# Altium PCB PCB_PWM_2022-05-03.pcbdoc
Units mm, origin at the board's own origin, x right, y up, seen from the top; angles counter-clockwise.
Board outline 126.75 x 66.17 mm, 2 copper layers (Top Layer, Bottom Layer); 12 components, 9 nets, 64 pads, 5 vias.
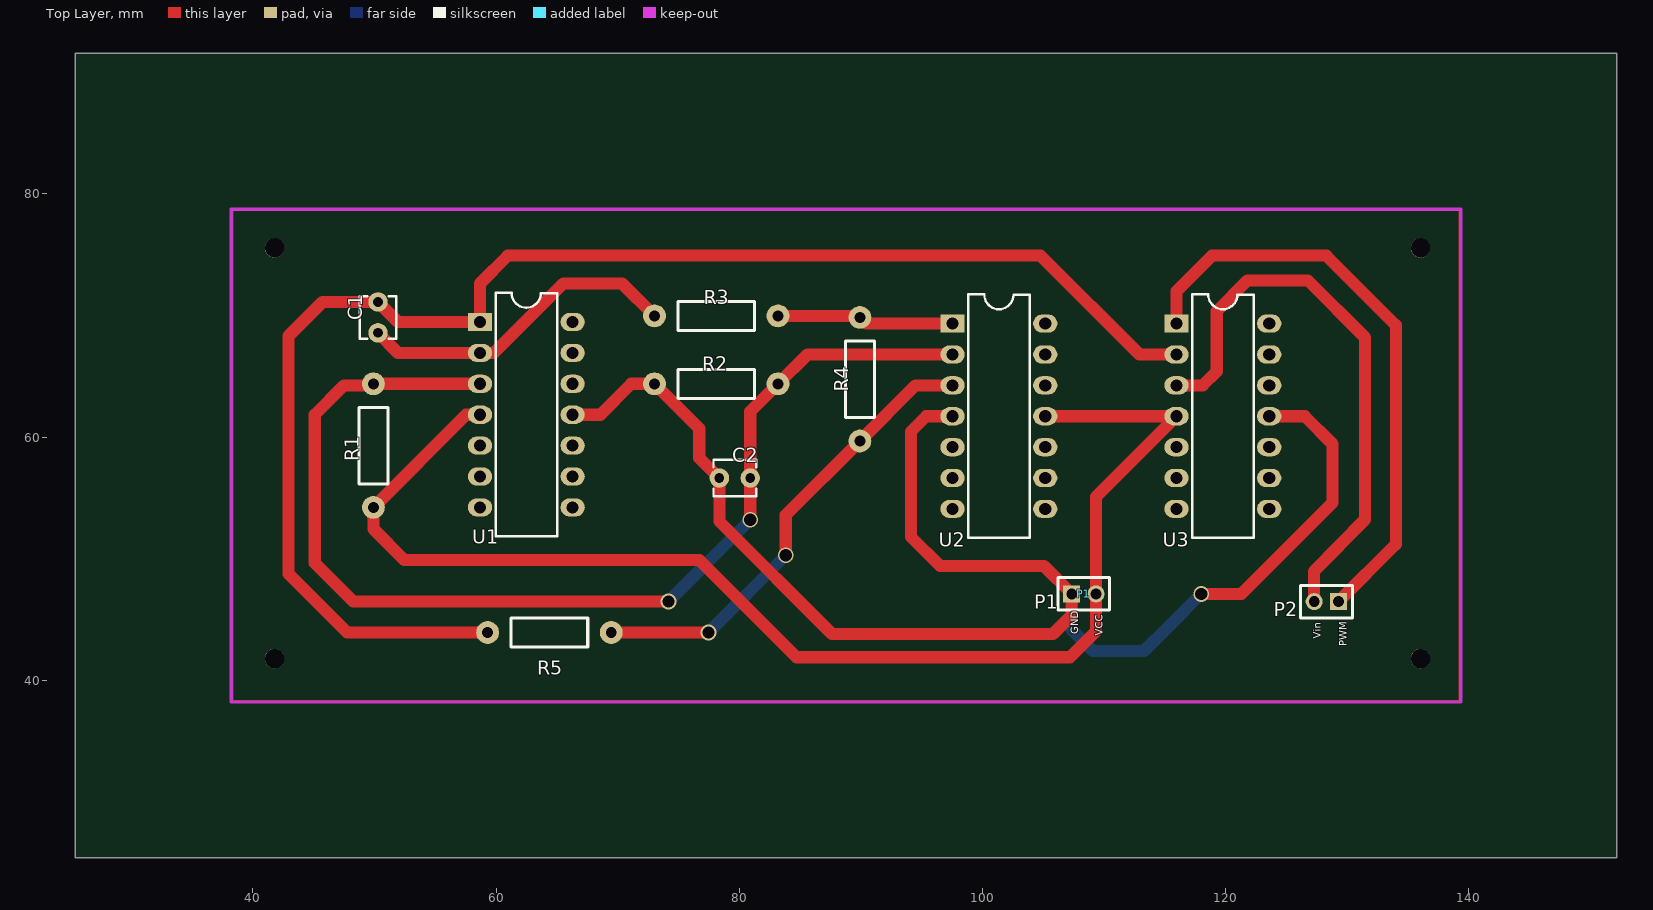
[diagram p0: Top Layer view]
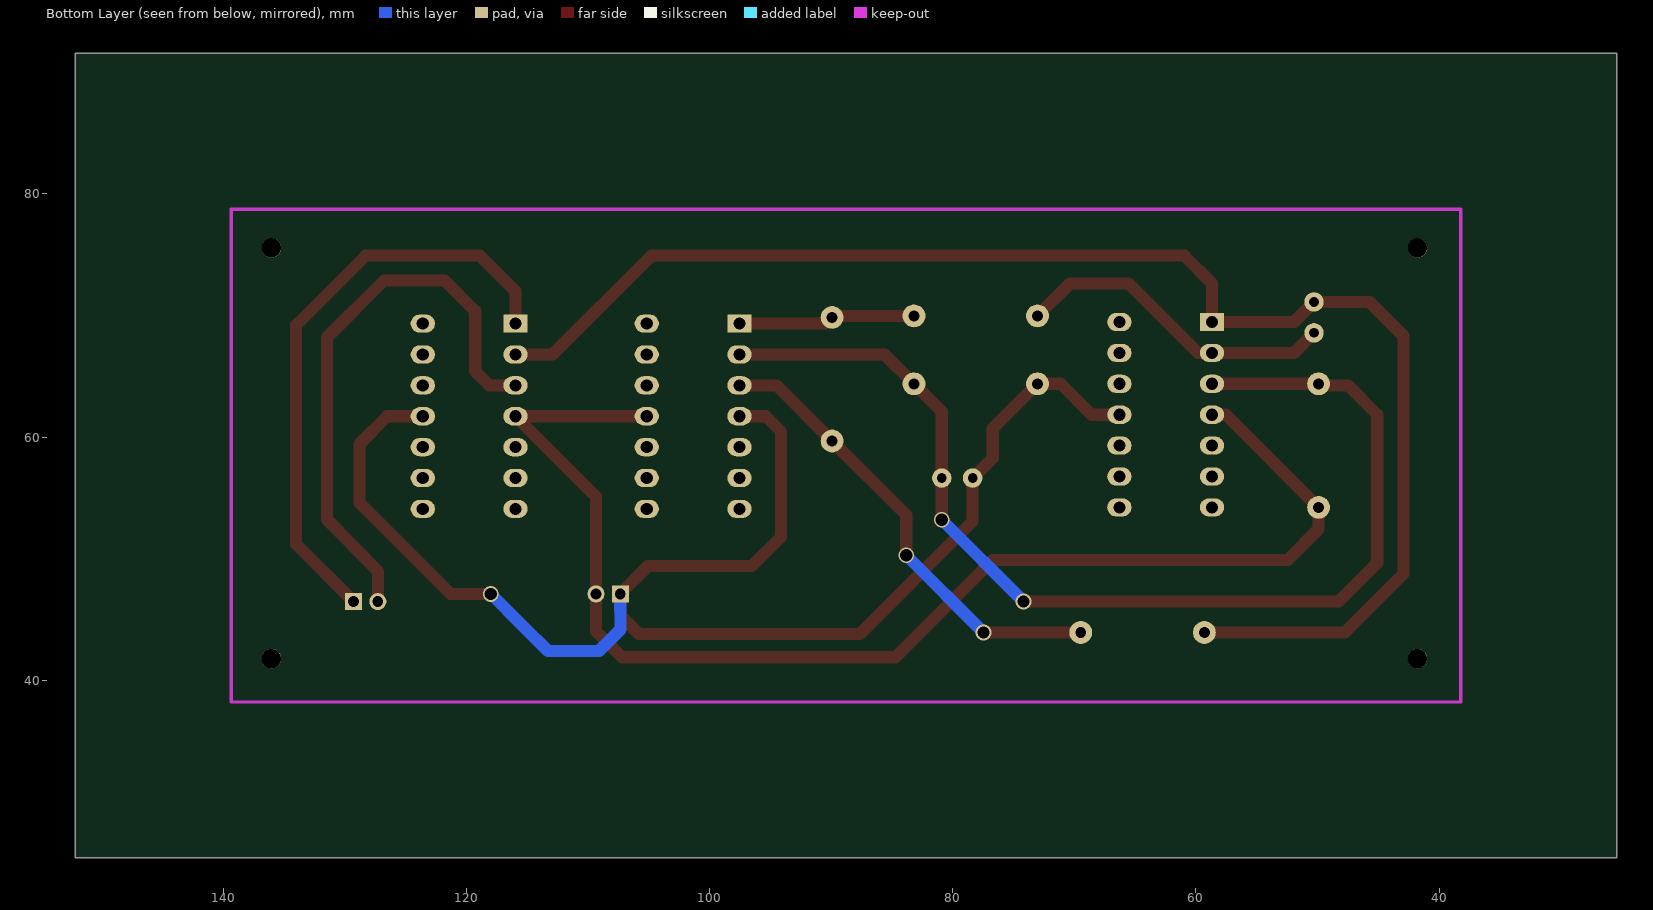
[diagram p1: Bottom Layer view, seen from below]

## Layer stack, top to bottom
Top Layer: signal copper (thickness not stored)
Dielectric: dielectric 0.32, FR-4, Dk 4.8
Bottom Layer: signal copper (thickness not stored)

## Board outline
152.146,25.4 25.4,25.4 25.4,91.567 152.146,91.567

## Components (designator, comment, footprint, x,y, rotation, side; value= is the part's Value field where it differs from the comment)
C1 "10nF" CAP-TH_L3.5-W3.0-P2.54-D0.8 50.292,69.85 r90 top
C2 "1uF" CAP-TH_L3.5-W3.0-P2.54-D0.8 79.629,56.642 r0 top
P1 "Female header1*2P" HDR-TH_2P-P2.00-V-F-1 108.331,47.117 r0 top
P2 "Female header1*2P" HDR-TH_2P-P2.00-V-F-1 128.27,46.482 r180 top
R1 "1k" AXIAL-0.4 49.911,59.309 r270 top
R2 "1k" AXIAL-0.4 78.105,64.389 r0 top
R3 "1k" AXIAL-0.4 78.105,69.977 r180 top
R4 "3k" AXIAL-0.4 89.916,64.77 r90 top
R5 "1k" AXIAL-0.4 64.389,43.942 r0 top
U1 "TL084CN" DIP-14_L20.0-W7.6-P2.54-LS7.6-BL 62.484,61.849 r270 top
U2 "TL084CN" DIP-14_L20.0-W7.6-P2.54-LS7.6-BL 101.346,61.722 r270 top
U3 "TL084CN" DIP-14_L20.0-W7.6-P2.54-LS7.6-BL 119.761,61.722 r270 top

## Footprints (in the part's own frame and the unit in brackets; to place one, negate y for a bottom-side part, rotate by r counter-clockwise, add the part's x,y. Pads: shape width x height; smd on the part's side, far side on the other; paste and mask are expansions set on the pad)
AXIAL-0.4 [mil]
  round 74 hole 35.4: 1(-200,0) 2(200,0)
  silkscreen extent -124,-47 124,47
CAP-TH_L3.5-W3.0-P2.54-D0.8 [mm]
  round 1.6 hole 0.8: 1(-1.27,0) 2(1.27,0)
  silkscreen extent -1.75,-1.5 1.75,1.5
DIP-14_L20.0-W7.6-P2.54-LS7.6-BL [mm]
  rect 1.5x2 hole 1: 1(-7.62,-3.81)
  oval 1.5x2 hole 1: 2(-5.08,-3.81) 3(-2.54,-3.81) 4(0,-3.81) 5(2.54,-3.81) 6(5.08,-3.81) 7(7.62,-3.81) 8(7.62,3.81) 9(5.08,3.81) 10(2.54,3.81) 11(0,3.81) 12(-2.54,3.81) 13(-5.08,3.81) 14(-7.62,3.81)
  silkscreen extent -10.03,-2.53 10,2.54
HDR-TH_2P-P2.00-V-F-1 [mm]
  rect 1.4x1.4 hole 0.889: 1(-1,0)
  round 1.4 hole 0.889: 2(1,0)
  silkscreen extent -2.14,-1.32 2.12,1.35

## Free pads (board coordinates)
  round 1.6 hole 1.6: 2(41.783,41.783) 2(41.783,75.565) 2(136.017,41.783) 2(136.017,75.565)

## Via types
v1: diameter 1.3, hole 1, Top Layer to Bottom Layer, tented both sides, 5 vias

## Nets (pads, with @x,y where several pads share a name; then routed paths per layer and width w, separated by ;. In a path a pad name is that pad's centre, name@x,y a point inside that pad or via, vN(x,y) a via of type N, cw(c..) or ccw(c..) an arc to the next point about the centre after c; other vN are vias at no path point)
GND: C2.1 P1.1 R2.1 U1.11 U2.4 U3.11 | length 125.4
  Top Layer w1: U1.11 68.58,61.849 71.12,64.389 R2.1 76.708,60.706 76.708,58.293 C2.1 78.359,53.086 87.63,43.815 105.791,43.815 107.315,45.339 P1.1 105.044,49.403 96.52,49.403 94.107,51.816 94.107,60.452 95.377,61.722 U2.4 ; v1(117.983,47.117) 121.285,47.117 128.778,54.61 128.778,59.436 126.492,61.722 U3.11
  Bottom Layer w1: P1.1 107.315,44.196 109.093,42.418 113.284,42.418 115.349,44.483 v1(117.983,47.117)
PWM: P2.1 U3.1 | length 49
  Top Layer w1: U3.1 115.951,72.009 118.872,74.93 128.27,74.93 133.985,69.215 133.985,51.196 P2.1
R1_1: C2.2 R1.1 R2.2 U1.3 U2.2 | length 94.2
  Top Layer w1: U1.3 R1.1 49.784,64.262 47.498,64.262 45.085,61.849 45.085,49.657 48.26,46.482 v1(74.168,46.482) ; v1(80.899,53.213) C2.2 80.899,62.103 R2.2 85.598,66.802 U2.2
  Bottom Layer w1: v1(74.168,46.482) v1(80.899,53.213)
R3_1: R3.1 R4.2 U2.1 | length 14.6
  Top Layer w1: R3.1 89.789,69.977 R4.2 90.424,69.342 U2.1
R3_2: C1.1 R3.2 U1.2 | length 26.9
  Top Layer w1: C1.1 51.943,66.929 U1.2 59.817,66.929 65.532,72.644 70.358,72.644 R3.2
R5_1: C1.2 R5.1 U1.1 U3.2 | length 120.3
  Top Layer w1: R5.1 47.752,43.942 42.926,48.768 42.926,68.326 45.72,71.12 C1.2 51.943,69.469 U1.1 58.674,72.644 60.96,74.93 104.775,74.93 112.903,66.802 U3.2
R5_2: R4.1 R5.2 U2.3 | length 38.4
  Top Layer w1: R5.2 v1(77.47,43.942) ; v1(83.82,50.292) 83.82,53.594 R4.1 94.488,64.262 U2.3
  Bottom Layer w1: v1(77.47,43.942) v1(83.82,50.292)
VCC: P1.2 R1.2 U1.4 U2.11 U3.4 | length 109.6
  Top Layer w1: U1.4 57.531,61.849 R1.2 49.911,52.451 52.451,49.911 76.708,49.911 84.709,41.91 107.188,41.91 109.332,44.054 P1.2 ; U2.11 U3.4 109.331,55.102 P1.2
VIN: P2.2 U3.3 | length 47.4
  Top Layer w1: U3.3 118.11,64.262 119.253,65.405 119.253,70.358 121.793,72.898 126.746,72.898 131.445,68.199 131.445,53.233 127.249,48.966 P2.2
pads on no net: U1.5 U1.6 U1.7 U1.8 U1.9 U1.10 U1.12 U1.13 U1.14 U2.5 U2.6 U2.7 U2.8 U2.9 U2.10 U2.12 U2.13 U2.14 U3.5 U3.6 U3.7 U3.8 U3.9 U3.10 U3.12 U3.13 U3.14

## Polygon pours and split planes (outlines as drawn)
GND on Top Layer (solid): 38.354,78.613 38.354,38.354 139.192,38.354 139.192,78.613

## Silkscreen, mask and mechanical layers (free items; w line width, h text height)
Top Overlay:
  text "P1" at 104.267,45.91 h1.14
  text "GND" at 107.869,43.815 h0.6 r90
  text "VCC" at 109.901,43.688 h0.6 r90
  text "Vin" at 127.808,43.434 h0.6 r90
  text "PWM" at 129.967,42.799 h0.6 r90